# Altium PCB Cree_Testing_Board_R0.PcbDoc
Units mm, origin at the board's own origin, x right, y up, seen from the top; angles counter-clockwise.
Board outline 27.94 x 24.77 mm, 2 copper layers (Top Layer, Bottom Layer); 8 components, 7 nets, 30 pads, 0 vias.
Unrouted connection lines stored in the file: 8.
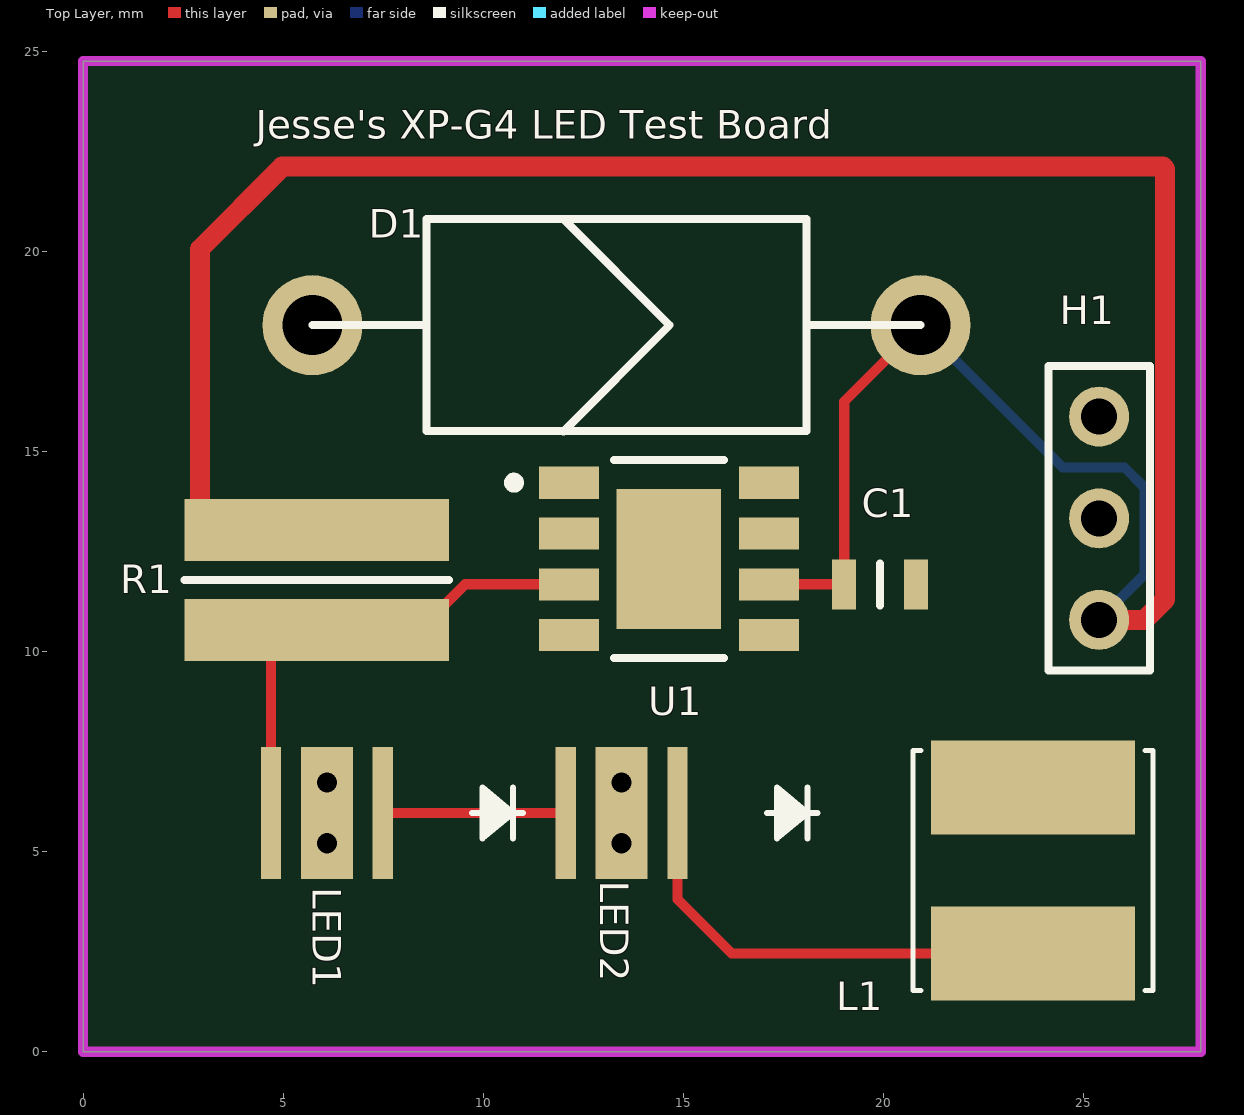
[diagram p0: Top Layer view]
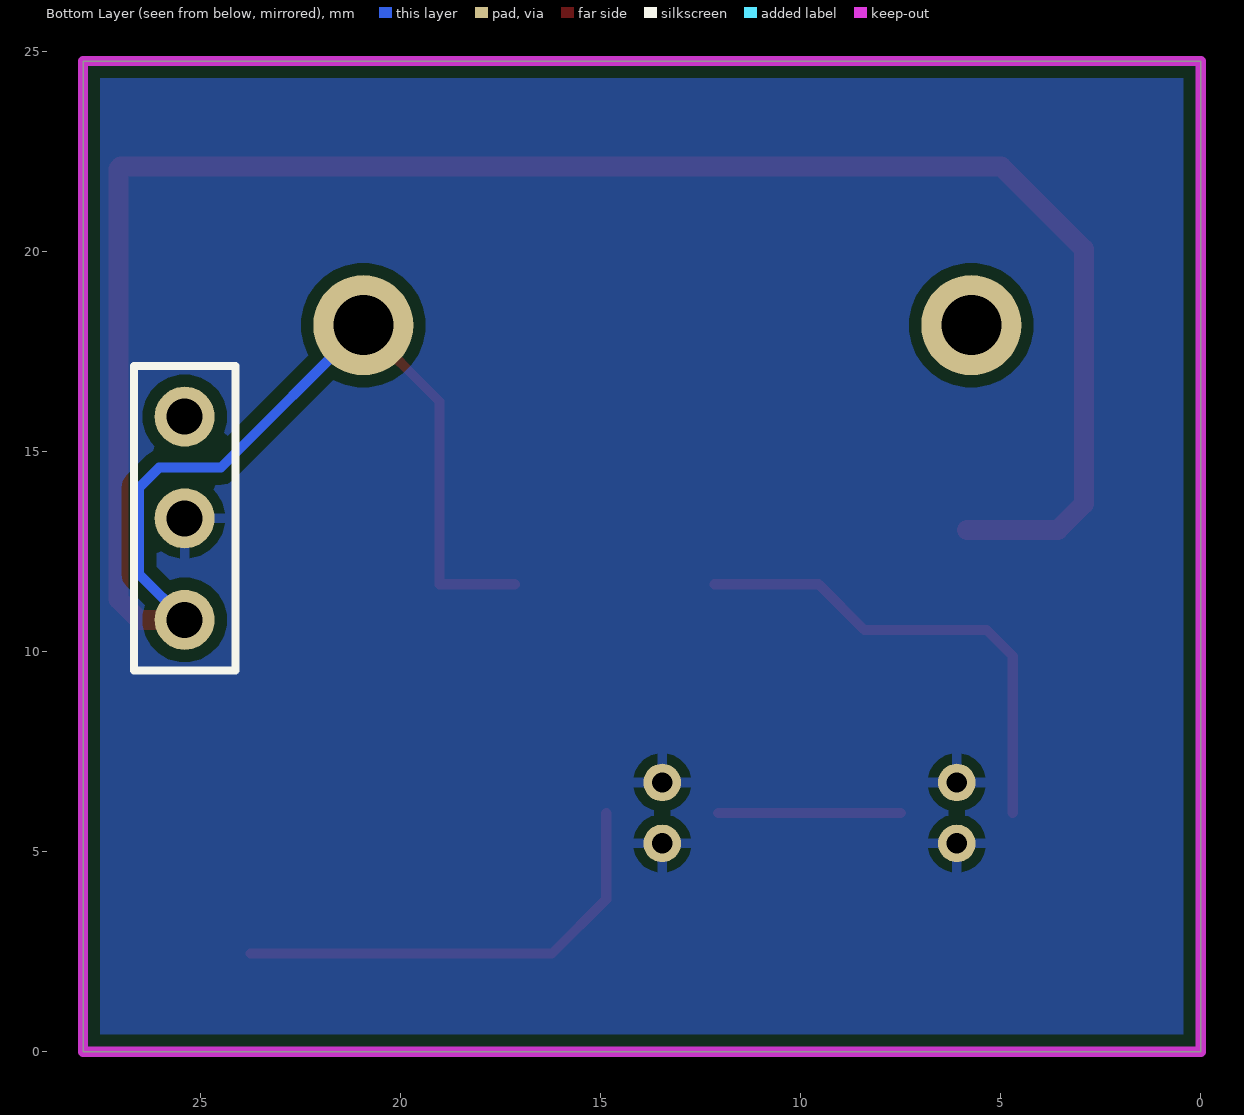
[diagram p1: Bottom Layer view, seen from below]

## Layer stack, top to bottom
Top Solder: solder mask 0.0102, Solder Resist, Dk 3.5
Top Layer: signal copper 0.0356
Dielectric 1: dielectric 0.32, FR-4, Dk 4.8
Bottom Layer: signal copper 0.0356
Bottom Solder: solder mask 0.0102, Solder Resist, Dk 3.5

## Board outline
0,0 0,24.765 27.94,24.765 27.94,0

## Design rules (kind name [scope] priority, off if disabled: settings)
BoardOutlineClearance [All] p1: gap=0.2 ignorepadtopadclearanceinfootprint=FALSE
Clearance "inPolygon Clearance" [InPolygon] p1: gap=0.3 ignorepadtopadclearanceinfootprint=TRUE // this rule ensures that every net within a polygon of a different net has a set clearance from the poly
Clearance "Different Diff Pair" [All] p2: gap=0.2 ignorepadtopadclearanceinfootprint=TRUE
Clearance "Same Diff Pair" [All] p3: gap=0.1 ignorepadtopadclearanceinfootprint=TRUE
Clearance "Different Nets" [not InAnyDifferentialPair] p4: gap=0.3 ignorepadtopadclearanceinfootprint=TRUE except(0.1: Arc-SMDPad Arc-THPad Arc-Via Arc-Text Track-SMDPad Track-THPad Track-Via Track-Text SMDPad-Text THPad-Text Via-Text Fill-Text Poly-Text Region-Text Text-Text; 0.12: Arc-Arc Arc-Track Track-Track; 0.15: SMDPad-SMDPad SMDPad-THPad SMDPad-Via THPad-THPad THPad-Via Via-Via; 0.2: Arc-Hole Track-Hole SMDPad-Hole THPad-Hole Via-Hole Fill-Hole Poly-Hole Region-Hole Text-Hole)
Clearance "Same Net" [not InAnyDifferentialPair] p5: gap=0 ignorepadtopadclearanceinfootprint=TRUE except(0.1: THPad-Via; 0.18: Arc-Arc Arc-Track Track-Track)
ComponentClearance [All] p1: gap=0.102 collisioncheckmode=3 verticalgap=0.102 showdistances=TRUE
DiffPairsRouting "Ethernet Routing" [InDifferentialPairClass('Ethernet_Pairs')] p1: maxlimit=0.2 minlimit=0.2 mostfreqgap=0.2 toplayer_minwidth=0.25 toplayer_maxwidth=0.25 toplayer_prefwidth=0.25 bottomlayer_minwidth=0.25 bottomlayer_maxwidth=0.25 bottomlayer_prefwidth=0.25 impedanceprofiledriven=TRUE maxuncoupledlength=12.7
DiffPairsRouting "USB Routing" [InDifferentialPairClass('USB_Pairs')] p2: maxlimit=0.127 minlimit=0.127 mostfreqgap=0.127 toplayer_minwidth=0.23 toplayer_maxwidth=0.23 toplayer_prefwidth=0.23 bottomlayer_minwidth=0.23 bottomlayer_maxwidth=0.23 bottomlayer_prefwidth=0.23 maxuncoupledlength=12.7
DiffPairsRouting "CAN Routing" [InDifferentialPairClass('CAN_Pairs')] p3: maxlimit=0.5 minlimit=0.5 mostfreqgap=0.5 toplayer_minwidth=0.201 toplayer_maxwidth=0.201 toplayer_prefwidth=0.201 bottomlayer_minwidth=0.201 bottomlayer_maxwidth=0.201 bottomlayer_prefwidth=0.201 impedanceprofiledriven=TRUE maxuncoupledlength=12.7
Height [All] p1: minheight=0 maxheight=1816.048 prefheight=12.7
HoleSize [All] p1: absolutevalues=TRUE maxlimit=6.3 minlimit=0.3 maxpercent=80.000 minpercent=20.000
HoleToHoleClearance [All] p1: gap=0.25 allowstackedmicrovias=FALSE
MatchedLengths "XTAL Nets Matched Delays" [InNetClass('XTAL_Nets')] p1: tolerance=25.4 checknetsindiffpair=FALSE checkdiffpairvsdiffpair=TRUE checkxsignals=TRUE checkothers=TRUE usedelayunits=TRUE delaytolerance=10.000000
MatchedLengths "Diff Pair Matched Delays" [InDifferentialPairClass('Ethernet_Pairs') or InDifferentialPairClass('USB_Pairs') or InDifferentialPairClass('CAN_Pairs')] p2: tolerance=5 checknetsindiffpair=TRUE checkdiffpairvsdiffpair=FALSE checkxsignals=FALSE checkothers=FALSE usedelayunits=TRUE delaytolerance=100.000000 phasematching=TRUE phasedelaytolerance=5.000000 phasedistance=12.7
MinimumAnnularRing [All] p1: minimumring=0.2
MinimumSolderMaskSliver [All] p1: minsoldermaskwidth=0
PlaneClearance "Supply Net Clearance" [InNetClass('Supply_Nets')] p1: clearance=0.5
PlaneClearance "All Nets" [All] p2: clearance=0.3
PolygonConnect "Supply Nets" [InNetClass('Supply_Nets')] p1: connectstyle=Relief reliefconductorwidth=0.3 reliefentries=4 polygonreliefangle="90 Angle" conductorbypadedge=TRUE mindistance=0.381 enablemindistance=FALSE airgapwidth=0.254
PolygonConnect General [All] p2: connectstyle=Relief reliefconductorwidth=0.254 reliefentries=4 polygonreliefangle="90 Angle" airgapwidth=0.254
RoutingVias [All] p1: holewidth=0.2 width=0.35 viastyle="Through Hole" minholewidth=0.15 minwidth=0.3 maxholewidth=6.3 maxwidth=6.55
SilkToSilkClearance [All] p1: silktosilkclearance=0
SilkToSolderMaskClearance [All] p1: minsilkscreentomaskgap=0 clearancetoexposedcopper=TRUE
SolderMaskExpansion [All] p1: expansion=0.075 istentingtop=FALSE
SupplyNets "Schematic Supply Nets_7" [InNet('+1V1')] p1: voltage=1.100
SupplyNets "Schematic Supply Nets_6" [InNet('+3V3')] p2: voltage=3.300
SupplyNets "Schematic Supply Nets_5" [InNet('XOUT')] p3: voltage=0.000
SupplyNets "Schematic Supply Nets_4" [InNet('+5V')] p4: voltage=5.000
SupplyNets "Schematic Supply Nets_2" [InNet('XIN')] p5: voltage=0.000
SupplyNets "Schematic Supply Nets" [InNet('RUN')] p6: voltage=0.000
SupplyNets "Schematic Supply Nets_3" [InNet('GND')] p7: voltage=0.000
SupplyNets "Schematic Supply Nets_1" [InNet('Earth')] p8: voltage=0.000
UnRoutedNet [All] p1: checkbadconnections=TRUE
Width "nRF Width" [InNetClass('nRF Signal')] p1: maxlimit=0.379 minlimit=0.379 preferedwidth=0.379 impedanceprofiledriven=TRUE minimp=50.000000 maximp=50.000000 favimp=50.000000 checkconnectedcopper=TRUE
Width [All] p2: maxlimit=100 minlimit=0.1 preferedwidth=0.2
20 further rules are at their usual default settings.

## Classes and differential pairs
component class Cree_Testing_Board: C1 D1 H1 L1 LED1 R1 U1

## Components (designator, comment, footprint, x,y, rotation, side; value= is the part's Value field where it differs from the comment)
C1 "[Cap] 0805 4.7uF 10% 50V" "[Cap] SMD 0805" 19.928,11.684 r0 top
D1 "1N5822" "[Diode] Thru-Hole" 13.335,18.161 r180 top
H1 "[Header] 1x3 90deg Male" "[Header] 1x3 90deg Male" 25.4,13.335 r90 top
L1 "SRN6045TA-330M" IND_SRN6045TA-330M 23.749,4.529 r270 top
LED1 "XPGWHT-01-0000-00DC4" LED_CREE_XPG 6.096,5.969 r270 top
LED2 "XPGWHT-01-0000-00DC4" LED_CREE_XPG 13.462,5.969 r270 top
R1 "CSR1225JKR100" FP-CSR1225-IPC_B 5.842,11.792 r270 top (schematic designator 1)
U1 "AL8843SP-13" FP-SO-8EP-MFG 14.647,12.319 r0 top

## Footprints (in the part's own frame and the unit in brackets; to place one, negate y for a bottom-side part, rotate by r counter-clockwise, add the part's x,y. Pads: shape width x height; smd on the part's side, far side on the other; paste and mask are expansions set on the pad)
"[Cap] SMD 0805" [mm]
  rect 0.6x1.25 smd: 1(-0.9,0) 2(0.9,0)
  silkscreen extent 0,-0.53 0,0.53, body extent -1,-0.63 1,0.63, height 1
"[Diode] Thru-Hole" [mm] "1N5822"
  round 2.5 hole 1.5: 1(-7.6,0) 2(7.6,0)
  silkscreen extent -7.6,-2.66 7.6,2.66, body extent -8.27,-2.66 8.27,2.66, height 7.16
"[Header] 1x3 90deg Male" [mm]
  round 1.5 hole 0.9: 1(-2.54,0) 2(0,0) 3(2.54,0)
  silkscreen extent -3.81,-1.27 3.81,1.27, body extent -3.81,-7.18 3.81,1.27, height 4.3
FP-CSR1225-IPC_B [mm]
  rect 1.556x6.608 smd paste+0 mask+0: 1(-1.251,0) 2(1.251,0)
  silkscreen extent 0,-3.3 0,3.3, body extent -2.28,-3.55 2.28,3.55, height 0.25
FP-SO-8EP-MFG [mm]
  rect 1.505x0.802 smd paste+0 mask+0: 1(-2.498,1.905) 2(-2.498,0.635) 3(-2.498,-0.635) 4(-2.498,-1.905) 5(2.498,-1.905) 6(2.498,-0.635) 7(2.498,0.635) 8(2.498,1.905)
  rect 2.613x3.502 smd paste+0 mask+0: 9(0,0)
  silkscreen extent -4,-2.47 1.37,2.47, body extent -3.35,-2.58 3.35,2.58, height 0.25
IND_SRN6045TA-330M [mm]
  rect 2.35x5.1 smd: 1(-2.075,0) 2(2.075,0)
  silkscreen extent -3,-3 3,3, body extent -3,-3 3,3, height 4.5
LED_CREE_XPG [mil]
  rect 130x20 smd paste+0 mask+0: 1(0,55) 3(0,-55)
  rect 130x51 smd paste+0 mask+0: 2(0,0)
  silkscreen extent -25,143 25,193

## Part data
C1: "GRT21BR61H475KE13L", Capacitance=4.7uF, Max Voltage=50V, Size Package=0805, Supplier Part Number 1=490-12394-1-ND, Tolerance=10%, Supplier 1=DigiKey
D1: library part "[Schottky] Thru-Hole 40V 3A", Supplier Part Number 1=1N5822GOS-ND, Supplier 1=DigiKey
H1: "2.54mm pitch"
L1: "Inductors, Fixed, 33uH 20% 1.5A shd SMD AEC-Q200", Package="Nonstandard Bourns", Check_prices=https://www.snapeda.com/parts/SRN6045TA-330M/Bourns/view-part/?ref=eda, MF=Bourns, MP=SRN6045TA-330M, SnapEDA_Link=https://www.snapeda.com/parts/SRN6045TA-330M/Bourns/view-part/?ref=snap
LED1 LED2: "No Description Available", Manufacturer_Name="Cree LED", VALUE_2=Value, Copyright="Copyright (C) 2026 Ultra Librarian. All rights reserved.", Manufacturer_Part_Number=XPGWHT-01-0000-00DC4
R1: library part CMP-26527-003070-1, "General Purpose Thick Film Chip Resistor, 1225, 0.1Ω, 5%, 100ppm/°C, 3W", Case Code (Imperial)=2512, Case Code (Metric)=6432, Case/Package=1225, Max Operating Temperature=155°C, Max Power Dissipation=3W, Min Operating Temperature=-55°C, Package Quantity=1000, Resistance=100mR, Resistor Type="Thick Film", Temperature Coefficient=100ppm/°C, Tolerance=5%, Height=0.041inch, Length=0.122inch, Mount="Surface Mount", Number of Terminations=2, Packaging="Tape and Reel", RoHS Compliant=Yes, Series=CSR, Width=0.248inch
U1: library part CMP-12753-000007-1, "IC LED MV INT SWITCH SO-8EP", Ambient Temperature Range High=+105°C, Ambient Temperature Range Low=-40°C, Manufacturer="Diodes Inc.", Max Junction Temp=+125°C, Max Supply Voltage=40V, Min Supply Voltage=4.5V, Nominal Supply Current=0.35mA, Output Current=3A, Output Voltage=36V, Package=SO-8EP, Switching Frequency=1MHz, Temperature="-40°C to +125°C", Automotive=No, Category=IC, ComponentLink2Description=Datasheet, ComponentLink2URL=https://www.diodes.com/assets/Datasheets/AL8843.pdf, Device Class L1="Integrated Circuits (ICs)", Device Class L2="Power Management ICs", Device Class L3="LED Drivers", Digikey Description="IC LED MV INT SWITCH SO-8EP", Dimming=Analog,PWM, Footprint Url=https://www.diodes.com/assets/Package-Files/SO-8EP.pdf, Height=1.63mm, Ipc Land Pattern Name=SOP127P600X163-8, Lead Free=Yes, Manufacturer Part Number=AL8843SP-13, Number Of Outputs=1, Octopart=https://octopart.com/al8843sp-13-diodes+inc.-88289989, RoHS=TRUE, Standoff Height=0mm, Switching Topology=Buck, Temperature Range High=+125°C, Temperature Range Low=-40°C

## Free pads (board coordinates)
  round 0.94 hole 0.508: 2(6.096,5.207) 2(6.096,6.731) 2(13.462,5.207) 2(13.462,6.731)

## Nets (pads, with @x,y where several pads share a name; then routed paths per layer and width w, separated by ;. In a path a pad name is that pad's centre, name@x,y a point inside that pad or via, vN(x,y) a via of type N, cw(c..) or ccw(c..) an arc to the next point about the centre after c; other vN are vias at no path point)
CONTROL: H1.3 U1.5
GND: C1.2 H1.2 LED1.2 LED2.2 pad.2 U1.1 U1.2 U1.9
NetD1_2: D1.2 L1.1 U1.7 U1.8
NetL1_2: L1.2 LED2.1 | length 11.6
  Top Layer w0.254: LED2.1 14.859,3.81 16.215,2.454 L1.2
NetLED1_1: LED1.1 LED2.3 | length 4.6
  Top Layer w0.254: LED1.1 LED2.3
SET: LED1.3 R1.2 U1.3 | length 12.1
  Top Layer w0.254: LED1.3 4.699,9.89 5.35,10.541 8.407,10.541 9.55,11.684 U1.3
VCC: C1.1 D1.1 H1.1 R1.1 U1.6 | length 67.4
  Top Layer w0.254: U1.6 C1.1 19.028,16.254 D1.1
  Top Layer w0.5: R1.1 3.572,13.044 2.921,13.694 2.921,20.066 4.978,22.123 27,22.123 27.051,22.073 27.051,11.303 26.543,10.795 H1.1
  Bottom Layer w0.254: D1.1 24.491,14.605 26.035,14.605 26.543,14.097 26.543,11.938 H1.1
pads on no net: U1.4

## Polygon pours and split planes (outlines as drawn)
GND on Bottom Layer "NONET_L01_P-001" (solid, pour order 1): 0,24.765 27.94,24.765 27.94,0 0,0

## Keep-outs
Keep-Out Layer:
  the board outline again, w0.254

## Silkscreen, mask and mechanical layers (free items; w line width, h text height)
Top Overlay:
  text "Jesse's XP-G4 LED Test Board" at 4.313,22.826 h0.71